# Altium PCB CM5 Nas.PcbDoc (part 3 of 4)
Units mm, origin at the board's own origin, x right, y up, seen from the top; angles counter-clockwise.
Board outline 152.4 x 101.6 mm, 20 copper layers (F.Cu, F.Mask, B.Cu, B.Mask, In1.Cu, F.SilkS, In2.Cu, B.SilkS, F.Adhes, B.Adhes, F.Paste, B.Paste, Dwgs.User, Cmts.User, Eco1.User, Eco2.User, Edge.Cuts, Margin, B.CrtYd, F.CrtYd); 373 components, 619 nets, 1990 pads, 0 vias.
Unrouted connection lines stored in the file: 1086.
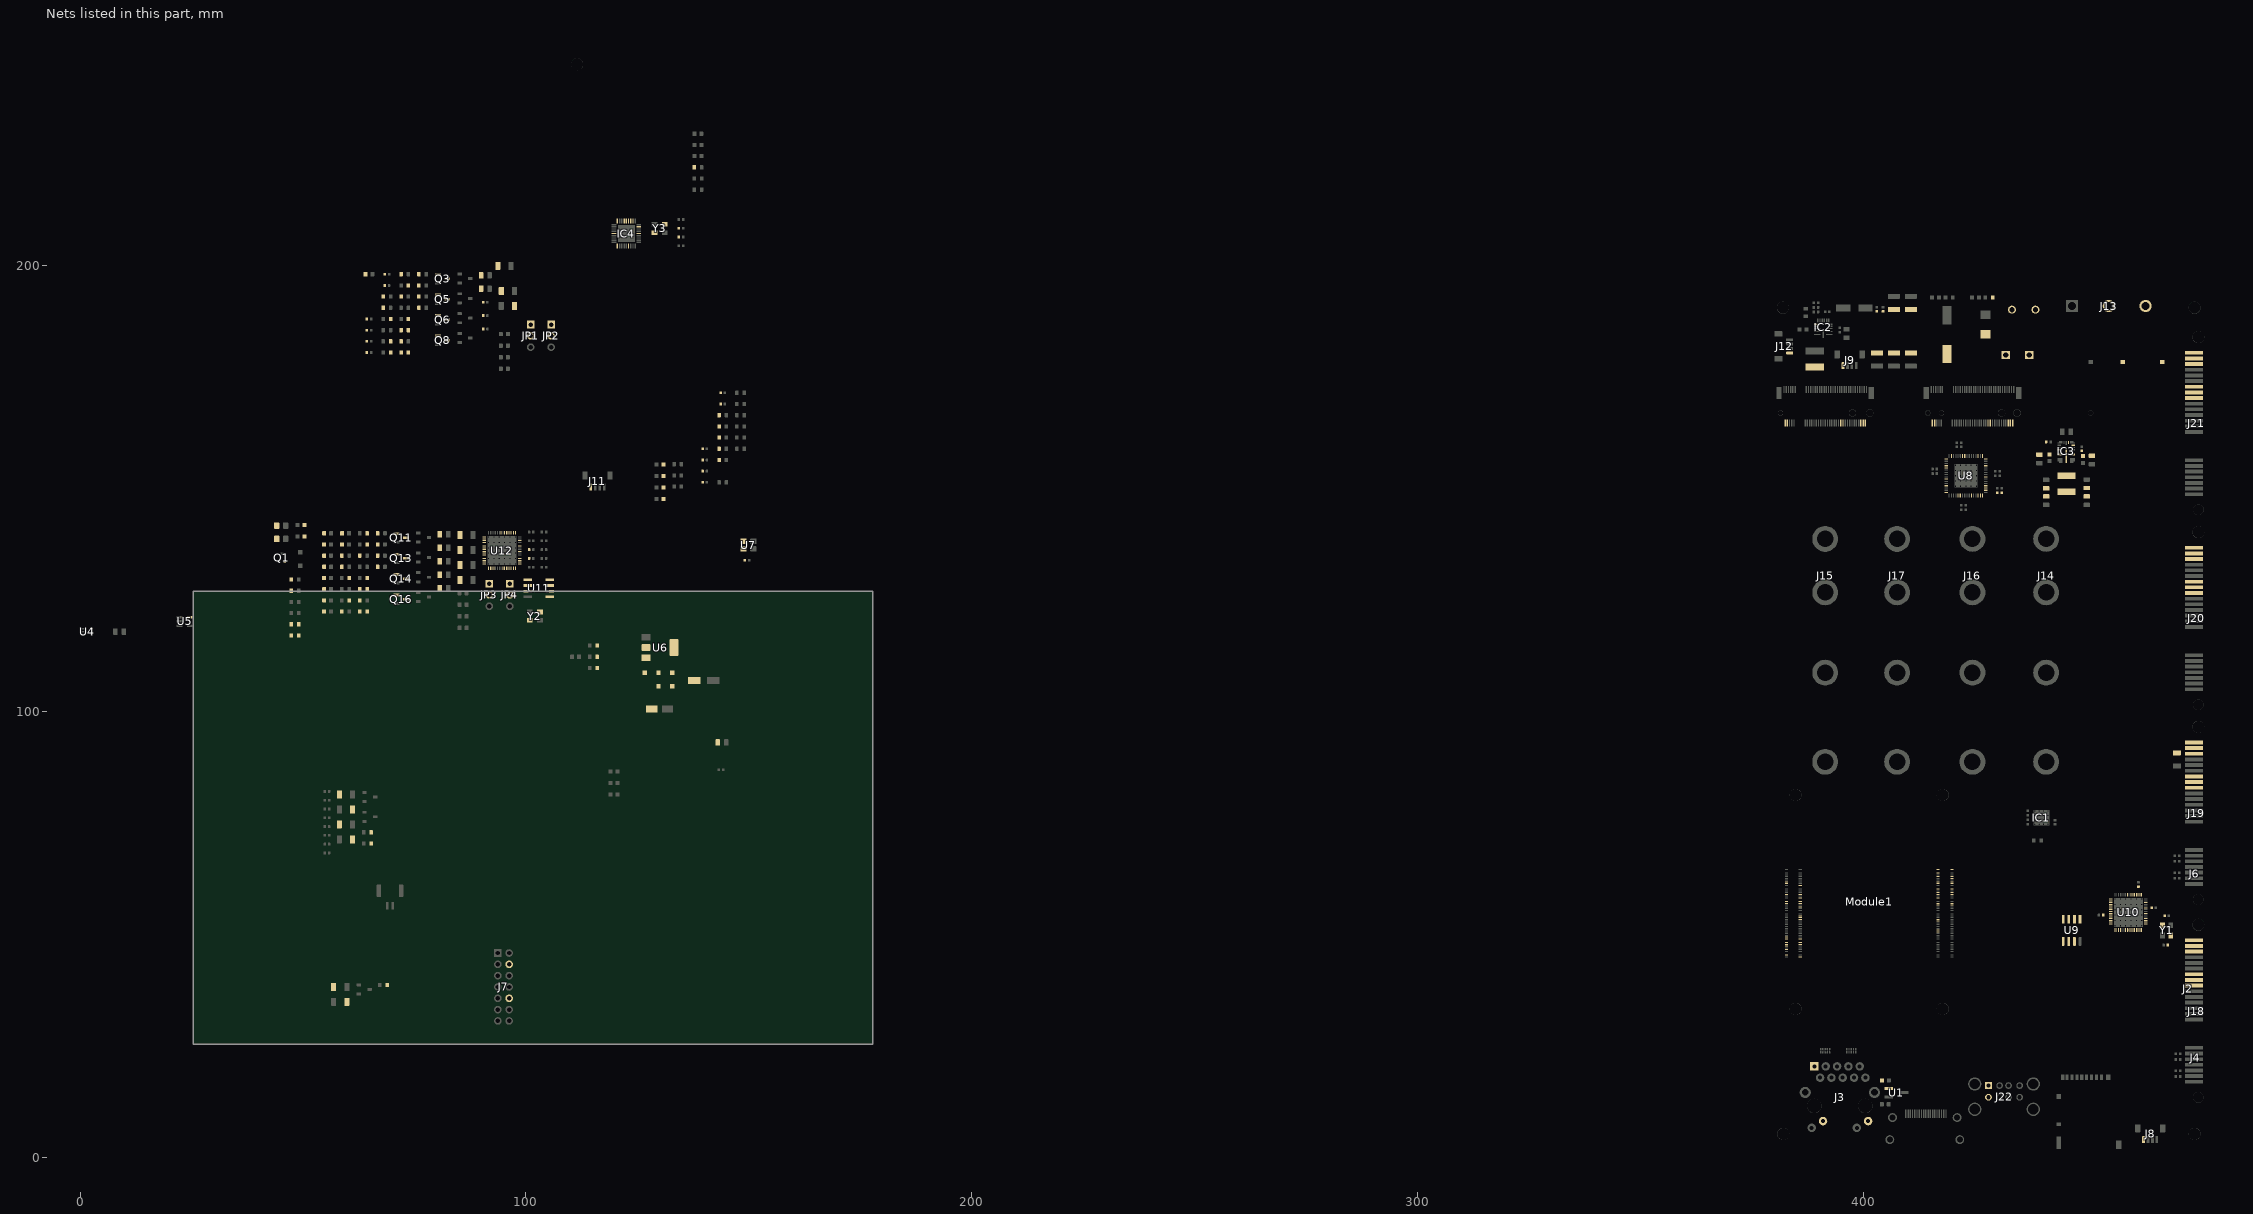
[diagram p12: the nets of this part, all layers, seen from the top]

## Nets (pads, with @x,y where several pads share a name; then routed paths per layer and width w, separated by ;. In a path a pad name is that pad's centre, name@x,y a point inside that pad or via, vN(x,y) a via of type N, cw(c..) or ccw(c..) an arc to the next point about the centre after c; other vN are vias at no path point) (continued)
"/Project Architecture/Sata Drives 1/GPIO11": R61.1 U10.55
"/Project Architecture/Sata Drives 1/GPIO12": R63.1 U10.11
"/Project Architecture/Sata Drives 1/GPIO13": U9.5 U10.15
"/Project Architecture/Sata Drives 1/GPIO14": R64.1 U10.9
"/Project Architecture/Sata Drives 1/GPIO15": U9.6 U10.13
"/Project Architecture/Sata Drives 1/GPIO16": U9.2 U10.14
"/Project Architecture/Sata Drives 1/GPIO17": U10.49
"/Project Architecture/Sata Drives 1/RSTn": U10.54
"/Project Architecture/Sata Drives 1/S-REXT": R47.1 U10.36
"/Project Architecture/Sata Drives 1/U-REXT": R52.2 U10.25
"/Project Architecture/Sata Drives 1/USB3-0-RX_N": U10.31
"/Project Architecture/Sata Drives 1/USB3-0-RX_P": U10.30
"/Project Architecture/Sata Drives 1/USB3-0-TX_N": U10.28
"/Project Architecture/Sata Drives 1/USB3-0-TX_P": U10.27
"/Project Architecture/Sata Drives 1/VBUS": R57.2
"/Project Architecture/Sata Drives 1/VBUS-S": C107.1 R57.1 U10.16
"/Project Architecture/Sata Drives 1/VCCH": U10.33 U10.43
"/Project Architecture/Sata Drives 1/XIN": C95.1 U10.35 Y1.1
"/Project Architecture/Sata Drives 1/XOUT": C96.1@468.34,47.626 U10.34 Y1.3
"/Project Architecture/Sata Drives 2/1V2A": C148.1 C149.1 C150.1 C151.1 C152.1 U12.29 U12.37 U12.40 U12.46
"/Project Architecture/Sata Drives 2/1V2D": C145.1 C146.1 C147.1 U12.4 U12.12 U12.17 U12.20 U12.32 U12.51 U12.57
"/Project Architecture/Sata Drives 2/3V3": C137.1 C138.1 JP3.1 JP4.1 R77.1 U11.3 U11.7 U11.8 U12.10 U12.52
"/Project Architecture/Sata Drives 2/3V3A": C139.1 C140.1 U12.26 U12.43
"/Project Architecture/Sata Drives 2/GPIO0": U12.3
"/Project Architecture/Sata Drives 2/GPIO1": R77.2 U12.1
"/Project Architecture/Sata Drives 2/GPIO2": U11.1 U12.18
"/Project Architecture/Sata Drives 2/GPIO3": U12.19
"/Project Architecture/Sata Drives 2/GPIO4": U12.7
"/Project Architecture/Sata Drives 2/GPIO5": JP3.2 U12.6
"/Project Architecture/Sata Drives 2/GPIO6": U12.2
"/Project Architecture/Sata Drives 2/GPIO7": JP4.2 U12.5
"/Project Architecture/Sata Drives 2/GPIO8": R74.2@64.355,129.978 R76.1 U12.8
"/Project Architecture/Sata Drives 2/GPIO9": R69.2 R70.1 U12.50
"/Project Architecture/Sata Drives 2/GPIO10": R80.1 U12.53
"/Project Architecture/Sata Drives 2/GPIO11": R79.1 U12.55
"/Project Architecture/Sata Drives 2/GPIO12": R81.1 U12.11
"/Project Architecture/Sata Drives 2/GPIO13": U11.5 U12.15
"/Project Architecture/Sata Drives 2/GPIO14": R82.1 U12.9
"/Project Architecture/Sata Drives 2/GPIO15": U11.6 U12.13
"/Project Architecture/Sata Drives 2/GPIO16": U11.2 U12.14
"/Project Architecture/Sata Drives 2/GPIO17": U12.49
"/Project Architecture/Sata Drives 2/RSTn": U12.54
"/Project Architecture/Sata Drives 2/S-REXT": R65.1 U12.36
"/Project Architecture/Sata Drives 2/U-REXT": R71.2 U12.25
"/Project Architecture/Sata Drives 2/USB3-1-RX_N": U12.31
"/Project Architecture/Sata Drives 2/USB3-1-RX_P": U12.30
"/Project Architecture/Sata Drives 2/USB3-1-TX_N": U12.28
"/Project Architecture/Sata Drives 2/USB3-1-TX_P": U12.27
"/Project Architecture/Sata Drives 2/VBUS": R75.2
"/Project Architecture/Sata Drives 2/VBUS-S": C135.1@54.735,140.018 R75.1 U12.16
"/Project Architecture/Sata Drives 2/VCCH": U12.33
"/Project Architecture/Sata Drives 2/XIN": C124.1@100.69,136.348 U12.35 Y2.1
"/Project Architecture/Sata Drives 2/XOUT": C125.1@100.69,134.378 U12.34 Y2.3
"/Project Architecture/Usb Switch/+3V3": IC4.15 IC4.23 IC4.26 R83.1
"/Project Architecture/Usb Switch/+3V3A": IC4.5 IC4.10 IC4.29 IC4.36
"/Project Architecture/Usb Switch/+5V S1": J22.1 J22.5
"/Project Architecture/Usb Switch/USB2_N": IC4.30
"/Project Architecture/Usb Switch/USB2_P": IC4.31
"/Project Architecture/Usb Switch/XIN": C155.1 IC4.33 Y3.1
"/Project Architecture/Usb Switch/XOUT": C156.1 IC4.32 Y3.3
BOOT: C79.1 IC3.16 L5.1
BT_nDis: Module1.91
"CM5 Shut": Module1.54 Q1.2
DM: U10.23
DP: U10.24
DPHY0_C_N: J2.8 Module1.127
DPHY0_C_P: J2.9 Module1.129
DPHY0_D0_N: J2.2 Module1.115
DPHY0_D0_P: J2.3 Module1.117
DPHY0_D1_N: J2.5 Module1.121
DPHY0_D1_P: J2.6 Module1.123
DPHY0_D2_N: J2.11 Module1.133
DPHY0_D2_P: J2.12 Module1.135
DPHY0_D3_N: J2.14 Module1.139
DPHY0_D3_P: J2.15 Module1.141
EEPROM_nWP: J7.4 Module1.20
ETH_LEDG: Module1.17 R1.1
ETH_LEDY: Module1.15 R2.1
FB1: C39.2 IC1.7 R20.2 R25.1
FB2: C31.2 IC1.24 R13.1 R15.2
FB3: C38.2 IC1.4 R19.2 R24.1